# Altium PCB JLCPCB_Design_V1.PcbDoc
Units mil, origin at the board's own origin, x right, y up, seen from the top; angles counter-clockwise.
Board outline 6000 x 4005 mil, 2 copper layers (Top Layer, Bottom Layer); 39 components, 43 nets, 150 pads, 14 vias.
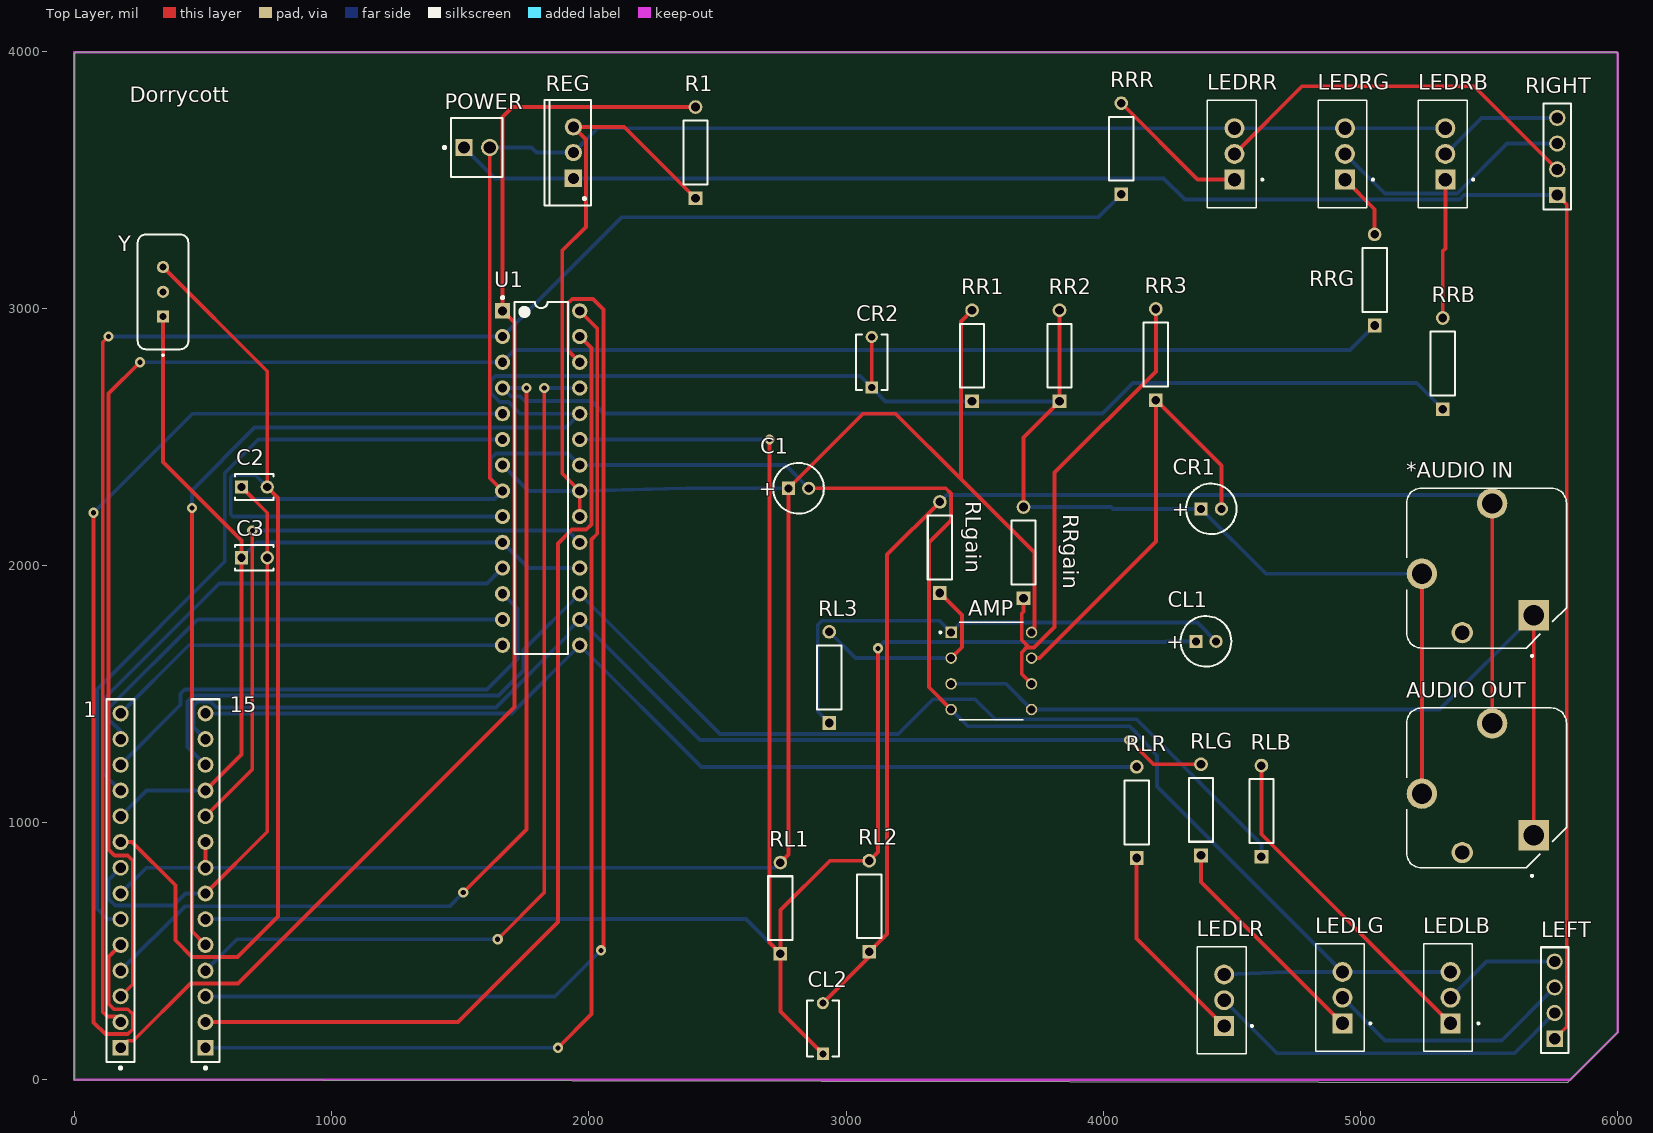
[diagram p0: Top Layer view]
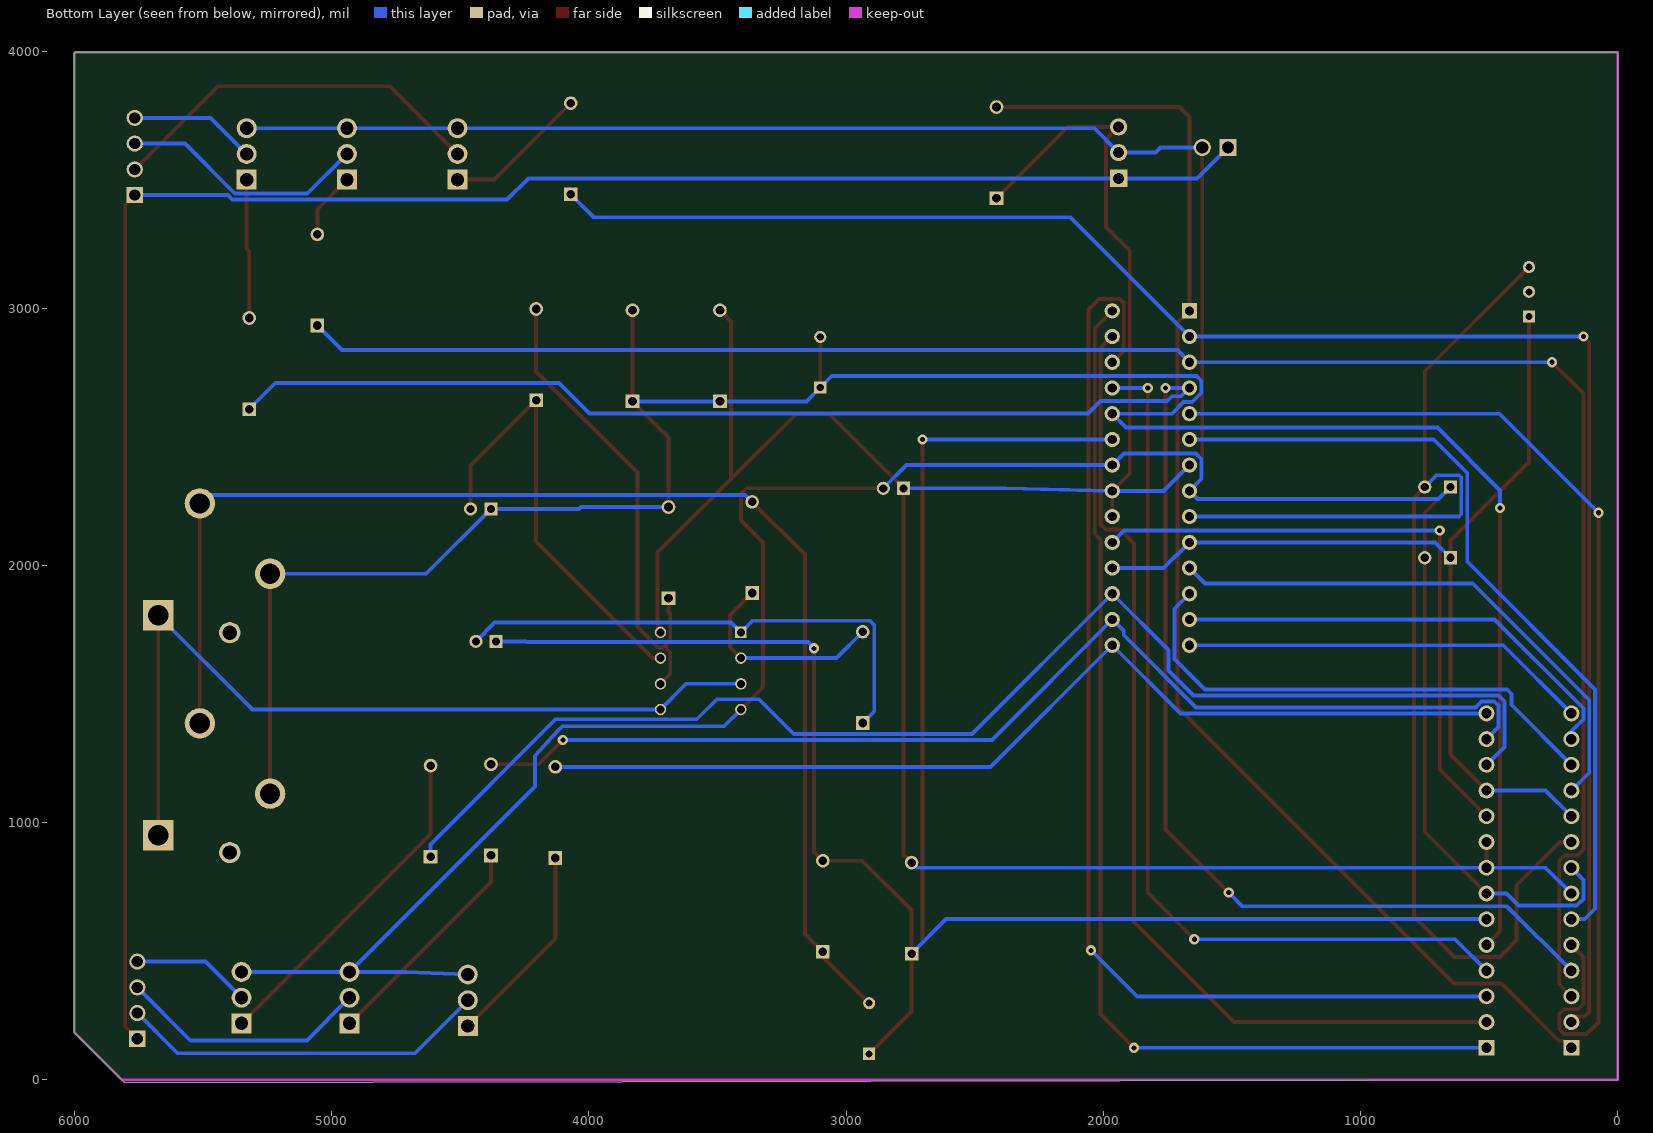
[diagram p1: Bottom Layer view, seen from below]

## Layer stack, top to bottom
Top Solder: solder mask 0.4, Solder Resist, Dk 3.5
Top Layer: signal copper 1.4
Dielectric 1: dielectric 12.6, FR-4, Dk 4.8
Bottom Layer: signal copper 1.4
Bottom Solder: solder mask 0.4, Solder Resist, Dk 3.5

## Board outline
0,0 0,3990 5,3995 6000,3995 6000,185 5805,-10

## Design rules (kind name [scope] priority, off if disabled: settings)
BoardOutlineClearance [All] p1: gap=7.87 ignorepadtopadclearanceinfootprint=FALSE except(15.75: Arc-SplitBarrior Arc-SplitContinuation Track-SplitBarrior Track-SplitContinuation SMDPad-SplitBarrior SMDPad-SplitContinuation THPad-SplitBarrior THPad-SplitContinuation Via-SplitBarrior Via-SplitContinuation Fill-SplitBarrior Fill-SplitContinuation Poly-SplitBarrior Poly-SplitContinuation Region-SplitBarrior Region-SplitContinuation Text-SplitBarrior Text-SplitContinuation)
Clearance "Clearance Bottom Layer" [OnLayer('Bottom Layer')] p1: gap=8 ignorepadtopadclearanceinfootprint=TRUE except(10: Arc-Text Track-Text SMDPad-Text THPad-Text Via-Text Fill-Text Poly-Text Region-Text Text-Text)
Clearance "Clearance Top Layer" [OnLayer('Top Layer')] p2: gap=8 ignorepadtopadclearanceinfootprint=TRUE except(10: Arc-Text Track-Text SMDPad-Text THPad-Text Via-Text Fill-Text Poly-Text Region-Text Text-Text)
Clearance [All] p3: gap=7.87 ignorepadtopadclearanceinfootprint=FALSE except(3.5: Arc-Arc Arc-Track Arc-SMDPad Track-Track Track-SMDPad SMDPad-SMDPad; 5: Arc-Via Track-Via SMDPad-Via THPad-Via Via-Via; 10: Arc-Text Track-Text SMDPad-Text THPad-Text Via-Text Fill-Text Poly-Text Region-Text Text-Text)
HoleSize [All] p1: absolutevalues=TRUE maxlimit=248.03 minlimit=7.87 maxpercent=80.000 minpercent=20.000
MinimumAnnularRing [All] p1: minimumring=3
MinimumSolderMaskSliver [All] p1: minsoldermaskwidth=3.94
PolygonConnect PolygonConnect_1 [All] p1: thpad.connectstyle=Relief thpad.reliefconductorwidth=20 thpad.reliefentries=4 thpad.polygonreliefangle="90 Angle" thpad.airgapwidth=10 smdpad.connectstyle=Relief smdpad.reliefconductorwidth=20 smdpad.reliefentries=4 smdpad.polygonreliefangle="90 Angle" smdpad.airgapwidth=10 via.connectstyle=Direct via.reliefconductorwidth=20 via.reliefentries=4 via.polygonreliefangle="90 Angle" via.airgapwidth=10
RoutingCorners [All] p1: cornerstyle=Round minsetback=100 maxsetback=100
RoutingVias [All] p1: holewidth=19.68 width=39.37 viastyle="Through Hole" minholewidth=7.87 minwidth=17.72 maxholewidth=39.37 maxwidth=78.74
SilkToSilkClearance [All] p1: silktosilkclearance=3.94
SilkToSolderMaskClearance [IsPad] p1: minsilkscreentomaskgap=3.94 clearancetoexposedcopper=TRUE
SolderMaskExpansion [All] p1: expansion=4 istentingtop=FALSE
Width [All] p1: maxlimit=100 minlimit=3.5 preferedwidth=15
25 further rules are at their usual default settings.

## Components (designator, comment, footprint, x,y, rotation, side; value= is the part's Value field where it differs from the comment)
1 "22-28-4146" FP-22-28-4146-MFG 180,775 r90 top (schematic designator "Pins 1-14")
15 "22-28-4146" FP-22-28-4146-MFG 510,775 r90 top (schematic designator "Pins 15-28")
"*AUDIO IN" "ACJS-MV35-3S" AMPHENOL_ACJM-MV35-2S 5490,1990 r0 top
AMP "TLE2082CP" DIP794W45P254L959H508Q8 3565,1590 r0 top
"AUDIO OUT" "ACJS-MV35-3S" AMPHENOL_ACJM-MV35-2S 5490,1135 r0 top
C1 ".1uF" CAPPR55-200-1100X500X1200 2815.63,2300 r0 top
C2 "22pF" KEMT-C315-THT-2 700,2305 r0 top
C3 "22pF" KEMT-C315-THT-2 700,2030 r0 top
CL1 "10uF" CAPPR55-200-1100X500X1200 4399.37,1705 r0 top
CL2 "47nF" FP-RDE2M1-MFG 2910,200 r90 top
CR1 "10uF" CAPPR55-200-1100X500X1200 4420,2220 r0 top
CR2 "47nF" FP-RDE2M1-MFG 3100,2790 r90 top
LEDLB "TIP31G" TO254P1060X482X2222-3 5350,320 r90 top
LEDLG "TIP31G" TO254P1060X482X2222-3 4930,320 r90 top
LEDLR "TIP31G" TO254P1060X482X2222-3 4470,310 r90 top
LEDRB "TIP31G" TO254P1060X482X2222-3 5330,3600 r90 top
LEDRG "TIP31G" TO254P1060X482X2222-3 4940,3600 r90 top
LEDRR "TIP31G" TO254P1060X482X2222-3 4510,3600 r90 top
LEFT "61300411121" 61300411121 5755,310 r90 top
POWER "22-27-2021" MOLX-22-27-2021_V 1565,3625 r0 top
R1 "10K" RESA60-630X240 2415,3605 r90 top
REG "7805" TO220 1940,3605 r90 top
RIGHT "6" 61300411121 5765,3590 r90 top
RL1 "100K" RESA60-630X240 2745,667.83 r90 top
RL2 "100K" RESA60-630X240 3090,675 r90 top
RL3 "100K" RESA60-630X240 2935,1565 r90 top
RLB "1K" RESA60-630X240 4615,1045 r90 top
RLG "1K" RESA60-630X240 4380,1050 r90 top
RLgain "10K" RESA60-630X240 3365,2070 r90 top
RLR "1K" RESA60-630X240 4130,1040 r90 top
RR1 "100K" RESA60-630X240 3490,2815 r90 top
RR2 "100K" RESA60-630X240 3830,2815 r90 top
RR3 "100K" RESA60-630X240 4204.49,2820 r90 top
RRB "1K" RESA60-630X240 5320,2785 r90 top
RRG "1K" RESA60-630X240 5055,3110 r90 top
RRgain "10K" RESA60-630X240 3690,2050 r90 top
RRR "1K" RESA60-630X240 4070,3620 r90 top
U1 "ATMEGA328P-PU" ATML-28P3 1815,2340 r0 top
Y "16 kHz" ECS-4X-3IL 345,3063.94 r90 top

## Footprints (in the part's own frame and the unit in brackets; to place one, negate y for a bottom-side part, rotate by r counter-clockwise, add the part's x,y. Pads: shape width x height; smd on the part's side, far side on the other; paste and mask are expansions set on the pad)
61300411121 [mm] "Pin Header, pitch 2.54 mm, THT, Vertical, single row, 4p"
  rect 1.6x1.6 hole 1.1: 1(-3.81,0)
  round 1.6 hole 1.1: 2(-1.27,0) 3(1.27,0) 4(3.81,0)
  silkscreen extent -5.23,-1.34 5.23,1.34, body extent -5.08,-1.27 5.08,1.27, height 8.57
AMPHENOL_ACJM-MV35-2S [mm]
  rect 3x3 / inner round 3 / far side rect 3x3 hole 2: 1(4.67,-4.67)
  round 2.1 hole 1.4: 2(-2.4,-6.38)
  round 3 hole 2: 3(-6.38,-0.56) 4(0.56,6.38)
  silkscreen extent -7.9,-8.77 7.9,7.9
ATML-28P3 [mm] "DIP, 28-Leads, Body 34.8x7.2mm, Pitch 2.54mm"
  rect 1.5x1.5 hole 0.9: 1(-3.81,16.51)
  round 1.5 hole 0.9: 2(-3.81,13.97) 3(-3.81,11.43) 4(-3.81,8.89) 5(-3.81,6.35) 6(-3.81,3.81) 7(-3.81,1.27) 8(-3.81,-1.27) 9(-3.81,-3.81) 10(-3.81,-6.35) 11(-3.81,-8.89) 12(-3.81,-11.43) 13(-3.81,-13.97) 14(-3.81,-16.51) 15(3.81,-16.51) 16(3.81,-13.97) 17(3.81,-11.43) 18(3.81,-8.89) 19(3.81,-6.35) 20(3.81,-3.81) 21(3.81,-1.27) 22(3.81,1.27) 23(3.81,3.81) 24(3.81,6.35) 25(3.81,8.89) 26(3.81,11.43) 27(3.81,13.97) 28(3.81,16.51)
  silkscreen extent -3.93,-17.4 2.65,17.93, body extent -3.95,-17.4 3.95,17.4, height 4.58
CAPPR55-200-1100X500X1200 [mm] "THD, 2-Leads, Dia 5mm, Body Length 11mm"
  rect 1.3x1.3 hole 0.8: 1(-1,0)
  round 1.3 hole 0.8: 2(1,0)
  silkscreen extent -2.5,-2.5 2.5,2.5, body extent -2.5,-2.5 2.5,2.5, height 12
DIP794W45P254L959H508Q8 [mm]
  rect 1.13x1.13 hole 0.78: 1(-3.97,3.81)
  round 1.13 hole 0.78: 2(-3.97,1.27) 3(-3.97,-1.27) 4(-3.97,-3.81) 5(3.97,-3.81) 6(3.97,-1.27) 7(3.97,1.27) 8(3.97,3.81)
  silkscreen extent -5.13,-4.8 3.17,4.8
ECS-4X-3IL [mm]
  rect 1.2x1.2 hole 0.7: 1(-2.44,0)
  round 1.2 hole 0.7: 2(0,0) 3(2.44,0)
  silkscreen extent -6.34,-2.5 5.68,2.5, body extent -5.68,-2.5 5.68,2.5, height 3.5
FP-22-28-4146-MFG [mm]
  rect 1.57x1.57 hole 1.02 paste-1000 mask+0: 1(-16.51,0)
  round 1.57 hole 1.02 paste-1000 mask+0: 2(-13.97,0) 3(-11.43,0) 4(-8.89,0) 5(-6.35,0) 6(-3.81,0) 7(-1.27,0) 8(1.27,0) 9(3.81,0) 10(6.35,0) 11(8.89,0) 12(11.43,0) 13(13.97,0) 14(16.51,0)
  silkscreen extent -18.63,-1.37 17.91,1.37, body extent -18.01,-1.47 18.01,1.47, height 0.25
FP-RDE2M1-MFG [mm]
  rect 1.2x1.2 hole 0.7 paste-1000 mask+0: 1(-2.5,0)
  round 1.2 hole 0.7 paste-1000 mask+0: 2(2.5,0)
  silkscreen extent -2.75,-1.58 2.75,1.58, body extent -3.2,-1.68 3.2,1.68, height 0.25
KEMT-C315-THT-2 [mm] "THD, 2-Leads, Body 3.81x2.54mm"
  rect 1.3x1.3 hole 0.8: 1(-1.27,0)
  round 1.3 hole 0.8: 2(1.27,0)
  silkscreen extent -1.91,-1.27 1.91,1.27, body extent -1.91,-1.27 1.91,1.27, height 4.66
MOLX-22-27-2021_V [mm] "Header, 2-Leads, Body 5.8x5.08mm"
  rect 1.7x1.7 hole 1.19: 1(-1.27,0)
  round 1.7 hole 1.19: 2(1.27,0)
  silkscreen extent -3.31,-2.9 2.54,2.9, body extent -2.54,-2.9 2.54,2.9, height 11.72
RESA60-630X240 [mm] "Axial Resistor, 2-Leads, Dia 2.4mm, Body Length 6.3mm"
  rect 1.35x1.35 hole 0.85: 1(-4.5,0)
  round 1.35 hole 0.85: 2(4.5,0)
  silkscreen extent -3.15,-1.2 3.15,1.2, body extent -3.15,-1.2 3.15,1.2, height 2.4
TO220 [mm] "TO, Thru-Hole, Vertical, Heatsink Mounted; 3 In-Line Leads; Pitch 2.54 mm"
  rect 1.7x1.7 hole 1.1: 1(-2.54,0)
  round 1.7 hole 1.1: 2(0,0) 3(2.54,0)
  silkscreen extent -5.2,-1.75 5.2,2.85, body extent -5.25,-1.8 5.25,2.9, height 19.7
TO254P1060X482X2222-3 [mm]
  rect 1.965x1.965 hole 1.31: 1(-2.54,0)
  round 1.965 hole 1.31: 2(0,0) 3(2.54,0)
  silkscreen extent -5.3,-2.85 5.3,2.66, body extent -4.98,-1.76 4.98,2.69, height 19.68

## Part data
1 15: library part CMP-04776-000356-1, "CONN HEADER VERT 14POS 2.54MM", Color=Black, Current Rating=4A, Package Quantity=1, Voltage Rating=250V, Connector Type="Male Pin", Contact Gender=Male, Contact Material=Brass, Contact Mating Length=0.24inch, Contact Plating=Gold, Contact Type="Male Pin", Gender=Male, Glow Wire Compliant=Non-compliant, Height=2.29mm, Housing Color=Black, Housing material=Thermoplastic, Lead Free="Lead Free", Length=35.6mm, Mount="Through Hole", Number of Circuits=14, Number of Contacts=14, Number of Positions=14, Number of Rows=1, Orientation=Vertical, Packaging=Bulk, Pitch=0.1inch, RoHS Compliant=Yes, Series="KK® 42375", Termination=Solder, Width=2.49mm
"*AUDIO IN" "AUDIO OUT": library part CMP-00027-00002-1, "Conn 3.5MM Audio Jack F 3 POS Solder ST Thru-Hole 4 Terminal 1 Port"
AMP: Package=None, Availability=Unavailable, MP=TLE2082CP, Price=None
C1: library part CMP-1665-00038-2, "Aluminum Electrolytic Capacitor, 10 uF, +/- 20%, 50 V, -40 to 85 degC, 2-Pin THD, RoHS, Bulk", Capacitance=10uF, Case/Package=Radial, Dielectric Material=Aluminium, Leakage Current=3uA, Manufacturer=Panasonic, Max Operating Temperature=85degC, Min Operating Temperature=-40degC, Package Description="2-Pin Radial Lead, Dia 5 mm, Height 12 mm", Package Quantity=200, Package Reference=CAPPR55-200-1100X500X1200, Ripple Current=65mA, Tolerance=20%, Voltage=50V, Datasheet URL=https://industrial.panasonic.com/cdbs/www-data/pdf/RDF0000/ABA0000C1218.pdf, Datasheet Version="Rev. 05, 10/2016", Diameter=5mm, Dissipation Factor=0.12%, Height=11mm, Height - Seated (Max)=0.472inch, Lead Diameter=0.5mm, Lead Free=LeadFree, Lead Pitch=2mm, Lead/Base Style=Straight, Length=11mm, Life (Hours)=2000Hour, Manufacturer URL=http://www.panasonic.com/, Mount=ThroughHole, Number of Pins=2, Packaging=Bulk, Radiation Hardening=No, REACH SVHC=NoSVHC, Ripple Current (AC)=65mA, RoHSCompliant=true, Termination=Radial, Voltage Rating=50V, Voltage Rating (DC)=50V
C2 C3: library part CMP-1664-00008-1, "Capacitor, Ceramic, 22 pF, +/-10 %, 100 V, -55 to 125 degC, 2-Pin THD, RoHS, Bulk", Case\Package=TO-220, Max Input Voltage="40 V", Max Operating Temperature="125 degC", Max Ouput Current="1.5 A", Min Input Voltage="4.2 V", Min Operating Temperature="0 degC", Output Voltage="1.2 V", Package Quantity=50, ComponentLink1Description="Manufacturer URL", ComponentLink1URL=http://www.kemet.com/, ComponentLink2Description=Datasheet, ComponentLink2URL=http://capacitoredge.kemet.com/capedge2/DataSheet/Datasheet-C315C220K1G5TA.pdf?pn=C315C220K1G5TA{BULK}, DatasheetVersion=Aug-16, Height="9.28 mm", Length="10.28 mm", Mount="Through Hole", Output Current="1.5 A", Outputs=1, PackageDescription="2-Pin Through Hole Device, Body 3.81 x 2.54 mm", PackageReference=C315-THT-2, Packaging=Rail/Tube, Pins=3, Radiation Hardening=No, REACH SVHC="No SVHC", RoHSCompliant=true, Weight="0.08113 oz", Width="4.82 mm"
CL1 CR1: library part CMP-1665-00038-2, "Aluminum Electrolytic Capacitor, 10 uF, +/- 20%, 50 V, -40 to 85 degC, 2-Pin THD, RoHS, Bulk", Case/Package=Radial, Dielectric Material=Aluminium, Leakage Current=3uA, Manufacturer=Panasonic, Max Operating Temperature=85degC, Min Operating Temperature=-40degC, Package Description="2-Pin Radial Lead, Dia 5 mm, Height 12 mm", Package Quantity=200, Package Reference=CAPPR55-200-1100X500X1200, Ripple Current=65mA, Tolerance=20%, Voltage=50V, Capacitance=10uF, Datasheet URL=https://industrial.panasonic.com/cdbs/www-data/pdf/RDF0000/ABA0000C1218.pdf, Datasheet Version="Rev. 05, 10/2016", Diameter=5mm, Dissipation Factor=0.12%, Height=11mm, Height - Seated (Max)=0.472inch, Lead Diameter=0.5mm, Lead Free=LeadFree, Lead Pitch=2mm, Lead/Base Style=Straight, Length=11mm, Life (Hours)=2000Hour, Manufacturer URL=http://www.panasonic.com/, Mount=ThroughHole, Number of Pins=2, Packaging=Bulk, Radiation Hardening=No, REACH SVHC=NoSVHC, Ripple Current (AC)=65mA, RoHSCompliant=true, Termination=Radial, Voltage Rating=50V, Voltage Rating (DC)=50V
CL2 CR2: library part CMP-06035-044503-1, "Ceramic Capacitor 47nF ±10% 450V X7T Radial", Capacitance=47nF, Case/Package=Radial, Dielectric=X7T, Max Operating Temperature=125°C, Min Operating Temperature=-55°C, Tolerance=10%, Voltage Rating=450V, Lead Pitch=5mm, REACH SVHC="No SVHC", Voltage Rating (DC)=450V
LEDLB LEDLG LEDLR LEDRB LEDRG LEDRR: "Bipolar (BJT) Transistor NPN 40 V 3 A 3MHz 2 W Through Hole TO-220", Package="TO-220-3 ON Semiconductor", Availability="In Stock", Check_prices=https://www.snapeda.com/parts/TIP31G/Onsemi/view-part/?ref=eda, MF="ON Semiconductor", MP=TIP31G, Price=None, Purchase-URL=https://pricing.snapeda.com/search/part/TIP31G/?ref=eda, SnapEDA_Link=https://www.snapeda.com/parts/TIP31G/Onsemi/view-part/?ref=snap
LEFT: library part CMP-1502-01064-1, "THT Vertical Pin Header WR-PHD, Pitch 2.54 mm, Single Row, 4 pins", Contact Resistance=20mOhm, Manufacturer="Wurth Elektronik", Operating Temperature=-40to105degC, Rated Current=3A, Withstanding Voltage=500VAC, Working Voltage=250VAC, Datasheet URL=https://katalog.we-online.de/em/datasheet/6130xx11121.pdf, Gender=Male, Manufacturer URL=http://www.we-online.de, Mounting Technology=THT, Orientation=Vertical, Package Reference=61300411121, Packaging=Bag, Part Number=61300411121, Pin Number=4, Pitch=2.54mm, Publisher=WurthElektronik, Row Number=Single
POWER: library part CMP-2000-05537-1, "Male Header, Pitch 2.54 mm, 1 x 2 Position, Height 11.7 mm, Tail Length 3.56 mm, 0 to 75 degC, RoHS, Bulk", Current - Max=4A, Manufacturer=Molex, Operating Temperature=0°Cto+75°C, Package Description="2-Leads Header, Body 5.08 x 5.8 mm, Pitch 2.54 mm", Package Version="Rev. BC, 02/2012", PartNumber=0022272021, Voltage - Max=250V, Contact Material=Tinplatedbrass, Current Rating=4A, Datasheet URL=http://www.molex.com/pdm_docs/sd/022272021_sd.pdf, Datasheet Version="Rev. F, 06/2009", Housing material=Nylon(UL94V-0), Manufacturer URL=http://www.molex.com/, Mounting Technology=ThroughHole, No. of Positions=2, No. of Rows=1, Orientation=Vertical, Package Reference=22-27-2021, Pitch=2.54mm, Voltage Rating=250V
R1 RL1 RL2 RL3 RLB RLG RLgain RLR RR1 RR2 RR3 RRB RRG RRgain RRR: library part CMP-1659-00073-1, "Axial Resistor, 100 KOhm, +/- 1%, 0.25 W, -55 to 155 degC, 2-Pin THD, RoHS, Bulk", Case\Package=Axial, Max Operating Temperature="155 degC", Min Operating Temperature="-55 degC", Package Quantity=200, Power Rating="250 mW", Resistance="475 Ohm", Tolerance=1%, Voltage Rating="250 V", ComponentLink1Description="Manufacturer URL", ComponentLink1URL=http://www.yageo.com/, ComponentLink2Description=Datasheet, ComponentLink2URL=http://www.yageo.com/documents/recent/Yageo%20LR_MFR_2013.pdf, DatasheetVersion=Apr-13, Length="0.248 inch", Mount="Through Hole", PackageDescription="2-Pin Axial Lead, Dia 2.4 mm, Body Length 6.3 mm", PackageReference=MFR-25, Packaging=Bulk, RoHSCompliant=true
REG: library part CMP-0244-00483-1, "Positive Voltage Regulator, 5V, 3-Pin TO-220", ComponentLink1Description="Manufacturer URL", ComponentLink1URL=http://www.st.com, ComponentLink2Description=Datasheet, ComponentLink2URL=http://www.st.com/internet/com/TECHNICAL_RESOURCES/TECHNICAL_LITERATURE/DATASHEET/CD00000444.pdf, ComponentLink3Description="Package Specification", ComponentLink3URL=http://www.st.com/internet/com/TECHNICAL_RESOURCES/TECHNICAL_LITERATURE/PACKAGE_INFORMATION/CD00004649.pdf, DatasheetVersion=16/11/2011, PackageDescription="TO, Thru-Hole, Vertical, Heatsink Mounted; 3 In-Line Leads; Pitch 2.54 mm", PackageReference=TO220, PackageVersion=ver3.0
RIGHT: library part CMP-1502-01064-1, "THT Vertical Pin Header WR-PHD, Pitch 2.54 mm, Single Row, 4 pins", Contact Resistance=20mOhm, Manufacturer="Wurth Elektronik", Operating Temperature=-40to105degC, Package Reference=61300411121, Rated Current=3A, Withstanding Voltage=500VAC, Working Voltage=250VAC, Datasheet URL=https://katalog.we-online.de/em/datasheet/6130xx11121.pdf, Gender=Male, Manufacturer URL=http://www.we-online.de, Mounting Technology=THT, Orientation=Vertical, Packaging=Bag, Part Number=61300411121, Pin Number=4, Pitch=2.54mm, Publisher=WurthElektronik, Row Number=Single
U1: library part CMP-020-00004-3, "8-Bit Microcontroller with 32 KBytes In-System Programmable Flash, 23 I/Os, -40 to 85 degC, 28-Pin PDIP (28P3), RoHS, Tube", Case/Package=DIP, Manufacturer=Atmel, Max Clock Frequency=20MHz, Max Operating Temperature=85°C, Max Supply Voltage=5.5V, Min Operating Temperature=-40°C, Min Supply Voltage=1.8V, Package Description="28-Pin Plastic Dual Inline Package, Body 34.671 x 7.3025 mm, Pitch 2.54 mm", Package Quantity=14, Package Reference=28P3, Package Version="Rev. B, 09/2001", Datasheet URL=http://www.atmel.com/images/Atmel-8271-8-bit-AVR-Microcontroller-ATmega48A-48PA-88A-88PA-168A-168PA-328-328P_datasheet_Complete.pdf, Datasheet Version="Rev. 8271J, 11/2015", Density=32KB, Ethernet Channels=0, I/Os=23, Interface=USART, Manufacturer URL=http://www.atmel.com/, Mounting Technology=TH, Package URL=http://www.atmel.com/images/Atmel-8271-8-bit-AVR-Microcontroller-ATmega48A-48PA-88A-88PA-168A-168PA-328-328P_datasheet_Complete.pdf, Packaging=Rail/Tube, Pins=28, RAM Size=2KB, RoHS Compliant=True
Y: library part CMP-1669-00002-2, "CRYSTAL 8.00 MHZ 20PF 49US", Manufacturer=ECS, PartNumber=ECS-80-20-4X, ComponentLink1Description=Datasheet, ComponentLink1URL=http://www.ecsxtal.com/store/pdf/hc-49usx.pdf, PackageReference=4X-3IL

## Via types
v1: diameter 39.37, hole 19.68, Top Layer to Bottom Layer, 14 vias

## Nets (pads, with @x,y where several pads share a name; then routed paths per layer and width w, separated by ;. In a path a pad name is that pad's centre, name@x,y a point inside that pad or via, vN(x,y) a via of type N, cw(c..) or ccw(c..) an arc to the next point about the centre after c; other vN are vias at no path point)
"Net*AUDIO IN_1": "*AUDIO IN.1" "AUDIO OUT.1" AMP.3 AMP.5 | length 3313.2
  Top Layer w15: 5673.86,951.14 5673.86,1806.14
  Bottom Layer w15: AMP.3 3621.3,1540 AMP.5 5307.72,1440 5673.86,1806.14
"Net*AUDIO IN_3": 15.5 "*AUDIO IN.3" "AUDIO OUT.3" CR1.1 CR2.1 CR2.2 RR1.1 RR2.1 RR2.2 RRgain.2 U1.24 | length 9637.7
  Top Layer w15: v1(457,2223) 457,578 15.5 ; CR2.1 CR2.2 ; RRgain.2 3690,2497.83 RR2.1 RR2.2 ; 5238.82,1112.95 5238.82,1967.95
  Bottom Layer w15: v1(457,2223) 457,2292 701,2536 1911,2536 U1.24 1733.03,2590 1688,2635.03 1653.97,2635.03 1619,2670 1619,2718 1637,2736 3055.57,2736 CR2.1 3153.74,2637.83 RR1.1 RR2.1 ; RRgain.2 4031,2227.17 4038.17,2220 CR1.1 4632.68,1967.95 5238.82,1967.95
"Net*AUDIO IN_4": "*AUDIO IN.4" "AUDIO OUT.4" CL2.2 RL2.1 RLgain.2 | length 5164
  Top Layer w15: CL2.2 3090,478.43 RL2.1 3160,567.83 3160,2042.17 RLgain.2 ; 5512.05,1386.18 5512.05,2241.18
  Bottom Layer w15: RLgain.2 3391.83,2274 5479.23,2274 5512.05,2241.18
NetAMP_1: AMP.1 CL1.2 RL3.1 | length 2019.2
  Bottom Layer w15: RL3.1 2890,1432.83 2890,1768 2907,1785 3363.7,1785 AMP.1 3446.7,1778 4365.74,1778 CL1.2
NetAMP_2: AMP.2 RL3.2 RLgain.1 | length 822
  Top Layer w15: RLgain.1 3451,1806.83 3451,1682.3 AMP.2
  Bottom Layer w15: RL3.2 3037.17,1640 AMP.2
NetAMP_4: 1.8 15.7 AMP.4 C1.2 C2.1 C3.2 LEDLB.3 LEDLG.3 LEDLR.3 LEDRB.3 LEDRG.3 LEDRR.3 POWER.2 REG.2 U1.8 U1.22 | length 14247.9
  Top Layer w15: 15.7 750,965 C3.2 750,2205 C2.1 ; POWER.2 1615,2340 U1.8 ; C1.2 3388,2300 3408,2280 3408,2175 3322,2089 3322,1526.7 AMP.4
  Bottom Layer w15: 1.8 133,778 133,704 159,678 385.49,678 432.49,725 15.7 ; C2.1 696,2259 1634,2259 U1.8 1619,2336 1619,2415 1640,2436 1919,2436 U1.22 2765,2390 C1.2 ; POWER.2 1777,3625 1797,3605 REG.2 2035,3700 LEDRR.3 LEDRG.3 LEDRB.3 ; AMP.4 3473.7,1375 4102.14,1375 4119.14,1358 4209,1260 4209,1141 LEDLG.3 ; LEDLR.3 4710,420 LEDLG.3 ; LEDLB.3 LEDLG.3
NetAMP_6: AMP.6 RR3.2 RRgain.1 | length 1912.8
  Top Layer w15: RRgain.1 3690,1821 3683,1814 3683,1710 3712,1681 ; AMP.6 3683,1578.3 3683,1662 3702,1681 3712,1681 ; RR3.2 4204.49,2754.49 3811,2361 3811,1761 3731,1681 3712,1681
NetAMP_7: AMP.7 CR1.2 RR3.1 | length 1749.1
  Top Layer w15: AMP.7 3751.55,1640 4204.49,2092.94 RR3.1 4459.37,2387.95 CR1.2
NetAMP_8: 1.7 15.8 15.9 AMP.8 C1.1 R1.1 REG.3 RL1.2 RR1.2 U1.7 U1.20 U1.21 | length 9815.4
  Top Layer w15: 15.8 15.9 ; U1.20 U1.21 1896.97,2358.03 1896.97,3223.97 1989,3316 1989,3656 REG.3 2137.83,3705 R1.1 ; RL1.2 2776.26,876.26 C1.1 3066.26,2590 3193,2590 3447,2336 ; RR1.2 3447,2949.17 3447,2336 ; AMP.8 3733,1754.75 3733,2050 3447,2336
  Bottom Layer w15: 1.7 280,825 15.8 2725,825 RL1.2 ; U1.7 1765,2290 U1.21 2380,2300 C1.1
NetC2_2: 1.9 C2.2 U1.9 Y.3 | length 5066.7
  Top Layer w15: 1.9 224.86,925 393,756.86 393,543 458,478 635,478 792,635 792,2263 C2.2 750,2755 Y.3
  Bottom Layer w15: C2.2 704,2351 616,2351 608,2343 608,2199 617,2190 U1.9
NetC3_1: 1.10 15.11 C3.1 U1.10 U1.18 Y.1 | length 3779.9
  Top Layer w15: Y.1 345,2402.45 650,2097.45 C3.1 650,1265 15.11
  Bottom Layer w15: 1.10 280,1125 15.11 ; C3.1 710,2090 U1.10 1765,1990 U1.18
NetCL1_1: 15.6 CL1.1 CL2.1 RL1.1 RL2.2 U1.23 | length 8183.3
  Top Layer w15: v1(2702,2490) 2702,533.67 RL1.1 ; CL2.1 2745,266.57 RL1.1 ; v1(3124,1678) 3124,886.17 RL2.2 2937.17,852.17 2745,660 RL1.1
  Bottom Layer w15: 15.6 2610.67,625 RL1.1 ; U1.23 v1(2702,2490) ; v1(3124,1678) 3148,1702 4240,1702 4243,1705 CL1.1
NetLEDLB_1: LEDLB.1 RLB.2 | length 1306.6
  Top Layer w15: RLB.2 4615,955 LEDLB.1
NetLEDLB_2: LEDLB.2 LEFT.4 | length 463
  Bottom Layer w15: LEDLB.2 5490,460 LEFT.4
NetLEDLG_1: LEDLG.1 RLG.1 | length 880.7
  Top Layer w15: RLG.1 4380,770 LEDLG.1
NetLEDLG_2: LEDLG.2 LEFT.3 | length 979.1
  Bottom Layer w15: LEDLG.2 5096,154 5549,154 LEFT.3
NetLEDLR_1: LEDLR.1 RLR.1 | length 793.7
  Top Layer w15: RLR.1 4130,550 LEDLR.1
NetLEDLR_2: LEDLR.2 LEFT.2 | length 1434.9
  Bottom Layer w15: LEDLR.2 4676,104 5599,104 LEFT.2
NetLEDRB_1: LEDRB.1 RRB.2 | length 542
  Top Layer w15: RRB.2 5320,3222 5330,3232 LEDRB.1
NetLEDRB_2: LEDRB.2 RIGHT.4 | length 493
  Bottom Layer w15: LEDRB.2 5470,3740 RIGHT.4
NetLEDRG_1: LEDRG.1 RRG.2 | length 260.5
  Top Layer w15: LEDRG.1 5055,3385 RRG.2
NetLEDRG_2: LEDRG.2 RIGHT.3 | length 969.3
  Bottom Layer w15: LEDRG.2 5094.18,3445.82 5376,3445.82 5570.18,3640 RIGHT.3
NetLEDRR_1: LEDRR.1 RRR.2 | length 563.1
  Top Layer w15: RRR.2 4367.17,3500 LEDRR.1
NetLEDRR_2: LEDRR.2 RIGHT.2 | length 1497.7
  Top Layer w15: LEDRR.2 4773,3863 5442,3863 RIGHT.2
NetLEFT_1: LEFT.1 POWER.1 REG.1 RIGHT.1 | length 7655.7
  Top Layer w15: LEFT.1 5802,207 5802,3403 RIGHT.1
  Bottom Layer w15: POWER.1 1635,3505 REG.1 4235,3505 4317.18,3422.82 5385.82,3422.82 5403,3440 RIGHT.1
"NetPins 1-14_1": 1.1 R1.2 U1.1 | length 5158.7
  Top Layer w15: 1.1 207.57,152.57 229,152.57 451.43,375 636,375 1711,1450 1711,2944 U1.1 1665,3744 1703.17,3782.17 R1.2
"NetPins 1-14_2": 1.2 RRR.1 U1.2 | length 6886.6
  Top Layer w15: v1(133,2890) 110.59,2867.59 110.59,264.37 128,246.96 158.04,246.96 1.2
  Bottom Layer w15: v1(133,2890) U1.2 2129,3354 3981.17,3354 RRR.1
"NetPins 1-14_3": 1.3 RRG.1 U1.3 | length 7462.5
  Top Layer w15: 1.3 227,372 227,853 208,872 157,872 133.59,895.41 133.59,2668.59 v1(255,2790)
  Bottom Layer w15: v1(255,2790) U1.3 1712,2837 4959.17,2837 RRG.1
"NetPins 1-14_4": 1.4 RRB.1 U1.4 | length 7401.2
  Top Layer w15: v1(1512,728) 1758,974 v1(1758,2690)
  Bottom Layer w15: 1.4 430,675 1459,675 v1(1512,728) ; v1(1758,2690) U1.4 1696.97,2658.03 1733.03,2658.03 1751.06,2640 2010,2640 2059,2591 3997,2591 4115,2709 5218.83,2709 RRB.1
"NetPins 1-14_5": 1.5 U1.5 | length 4326.4
  Top Layer w15: v1(75,2205) 75,224 121,178 208,178 227,197 227,256 208,275 155,275 133.59,296.41 133.59,478.59 1.5
  Bottom Layer w15: v1(75,2205) 460,2590 U1.5
"NetPins 1-14_6": 1.6 U1.6 | length 3143.6
  Bottom Layer w15: 1.6 128,625 87.59,665.41 87.59,1517.41 585,2014.81 585,2360 715,2490 U1.6
"NetPins 1-14_11": 1.11 U1.11 | length 2147.6
  Bottom Layer w15: 1.11 110.59,1194.41 110.59,1477 563.59,1930 1605,1930 U1.11
"NetPins 1-14_12": 1.12 U1.12 | length 2017.1
  Bottom Layer w15: 1.12 413.37,1458.37 413.37,1501.41 429.37,1517.41 1604.84,1517.41 1723.42,1635.99 1723.42,1831.58 U1.12
"NetPins 1-14_13": 1.13 U1.13 | length 1813.5
  Bottom Layer w15: 1.13 180,1356 133.59,1402.41 133.59,1445 478.59,1790 U1.13
"NetPins 1-14_14": 1.14 U1.14 | length 1594.8
  Bottom Layer w15: 1.14 445,1690 U1.14
"NetPins 15-28_1": 15.1 U1.28 | length 4326.6
  Top Layer w15: v1(1880,125) 2011,256 2011,2101.54 2033.03,2123.57 2033.03,2921.97 U1.28
  Bottom Layer w15: 15.1 v1(1880,125)
"NetPins 15-28_2": 15.2 U1.27 | length 3912.5
  Top Layer w15: 15.2 1491,225 1880,614 1880,2086 1934,2140 1990.03,2140 2010.03,2160 2010.03,2844.97 U1.27
"NetPins 15-28_3": 15.3 U1.26 | length 4515.6
  Top Layer w15: U1.26 1919.97,2835.03 1919.97,3019.97 1936,3036 2016,3036 2057,2995 2057,514 v1(2047,504)
  Bottom Layer w15: 15.3 1868,325 v1(2047,504)
"NetPins 15-28_4": 15.4 U1.25 | length 3542.5
  Top Layer w15: v1(1646,547) 1827,728 v1(1827,2690)
  Bottom Layer w15: 15.4 632,547 v1(1646,547) ; v1(1827,2690) U1.25
"NetPins 15-28_10": 15.10 U1.19 | length 2478.4
  Top Layer w15: 15.10 692,1207 v1(692,2136)
  Bottom Layer w15: v1(692,2136) 1919,2136 U1.19
"NetPins 15-28_12": 15.12 RLB.1 U1.17 | length 5233
  Bottom Layer w15: 15.12 440.59,1294.41 440.59,1472 463,1494.41 1648.41,1494.41 1746.42,1592.42 1746.42,1671.42 U1.17 2510,1345 3203,1345 3338,1480 3502,1480 3580,1402 4129,1402 4615,916 RLB.1
"NetPins 15-28_13": 15.13 RLG.2 U1.16 | length 4466.3
  Top Layer w15: v1(4101,1322) 4195.83,1227.17 RLG.2
  Bottom Layer w15: 15.13 463.59,1371.41 463.59,1455 480,1471.41 529.22,1471.41 552.63,1448 1639,1448 1920,1729 1920,1745 U1.16 2433,1322 v1(4101,1322)
"NetPins 15-28_14": 15.14 RLR.2 U1.15 | length 3925.6
  Bottom Layer w15: 15.14 1700,1425 U1.15 2437.83,1217.17 RLR.2
pads on no net: "*AUDIO IN.2" "AUDIO OUT.2" Y.2

## Keep-outs
Keep-Out Layer:
  lines w10: 0,0 0,3995 5995,3995 6000,3990 6000,185 5815,0 0,0

## Silkscreen, mask and mechanical layers (free items; w line width, h text height)
Top Overlay:
  text "Dorrycott" at 215,3799.99 h60

## Text inside footprints (layer, text, board x,y; h text height)
C1: Top Overlay "+" at 2661.77,2270.98 h59.06
CL1: Top Overlay "+" at 4245.51,1675.98 h59.06
CR1: Top Overlay "+" at 4266.14,2190.98 h59.06